# EAGLE board Signalgenerator-xmega (EAGLE 7.1.0)
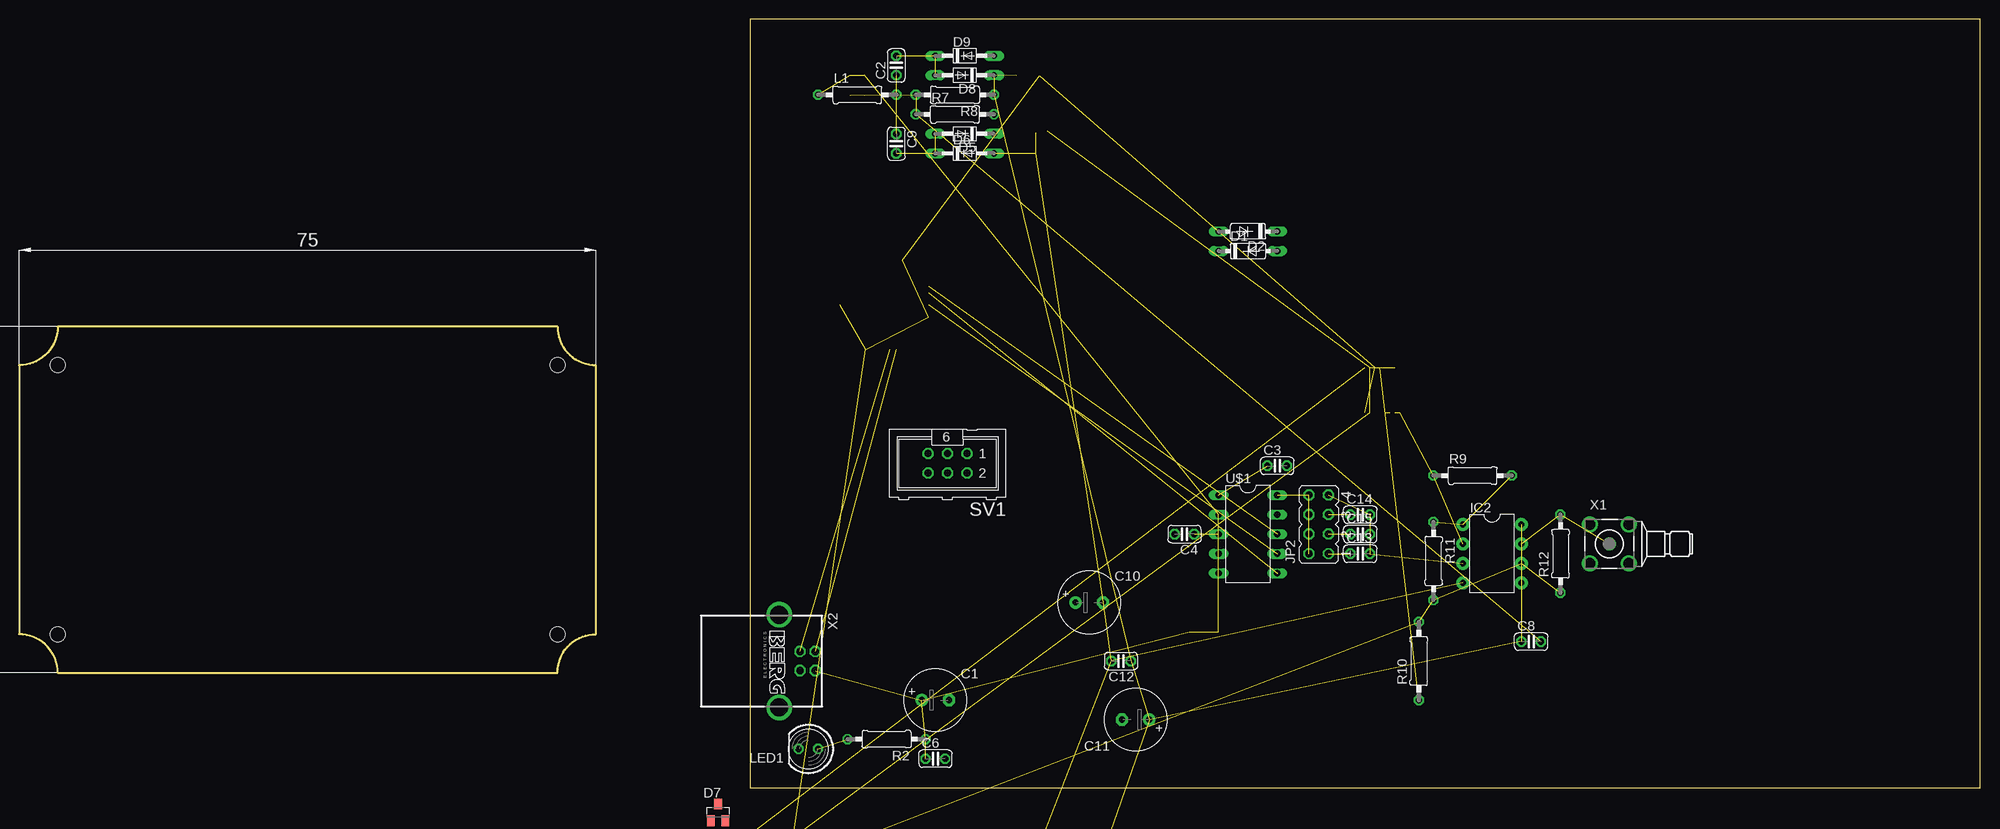
[diagram p0: board, top side]
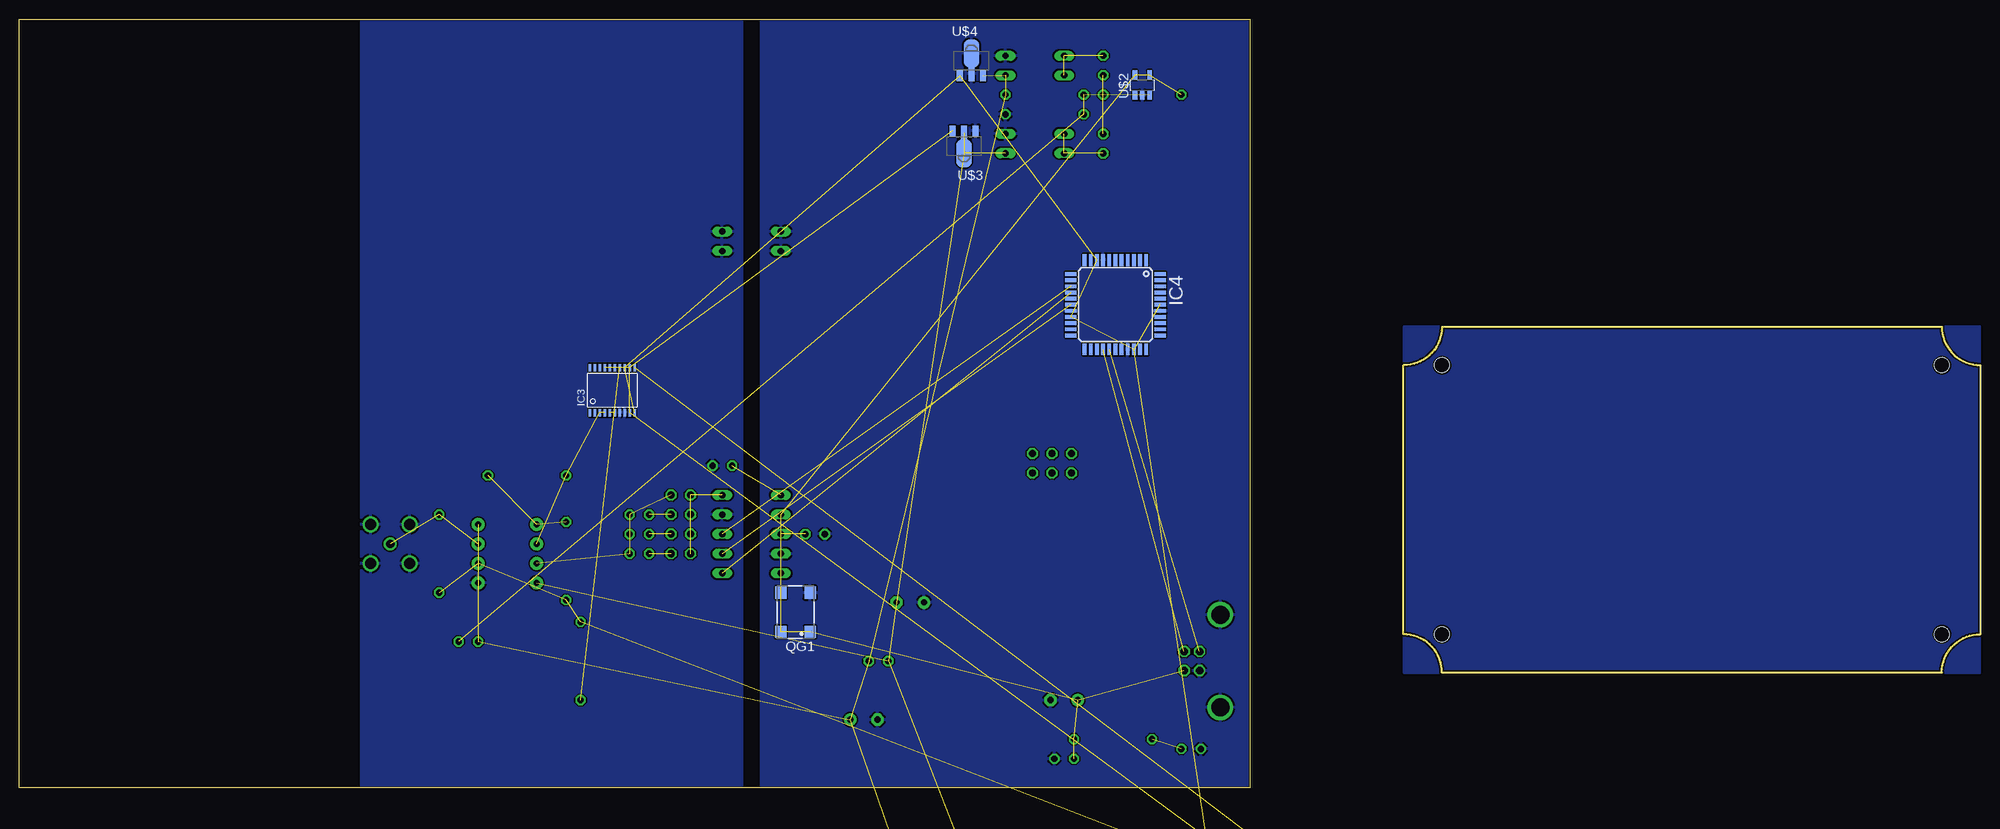
[diagram p1: board, bottom side, seen from below]

Size 255 x 100 mm. Coordinates in mm from the lower left corner, seen from the top.
Outline: 95,0 255,0 255,100 95,100 95,0
Outline: 70,60 5,60 arc-90 0,55 0,20 arc-90 5,15 70,15 arc-90 75,20 75,55 arc-90 70,60
Copper layers (1*16): Top 0.035mm / dielectric 1.5mm / Bottom 0.035mm
Design rules "default *": minimum track width 10mil, minimum drill 24mil, track to track 8mil, track to pad 8mil, pad to pad 8mil, via to via 8mil, smd to smd 8mil, copper to edge 6mil, drill to drill 8mil, minimum pad ring 10mil, minimum via ring 8mil, stop-mask expansion 4mil, vias tented up to drill 0mil, thermal gap 10mil
Holes 2 mm at 5,55 5,20 70,20 70,55

## Footprints (pad centres in the part's own frame; a part is rotated, then mirrored left to right if it is on the bottom)
E3,5-8 = drill 0.813 pad 1.6: + -1.778,0 | drill 0.813 pad 1.6 octagon: - 1.778,0
C025-024X044 = drill 0.813 octagon: 1 -1.27,0; 2 1.27,0
E2,5-7 = drill 0.813 pad 1.6: + -1.27,0 | drill 0.813 pad 1.6 octagon: - 1.27,0
DO35-7 = drill 0.813 long: A 3.81,0; C -3.81,0
DO34-7 = drill 0.813 long: A 3.81,0; C -3.81,0
SOT23 = smd 1 x 1.4: 1 -0.95,-1.1; 2 0.95,-1.1; 3 0,1.1
DIL08 = drill 0.813 pad 1.676: 1 -3.81,-3.81; 2 -1.27,-3.81; 3 1.27,-3.81; 4 3.81,-3.81; 5 3.81,3.81; 6 1.27,3.81; 7 -1.27,3.81; 8 -3.81,3.81
TSSOP20 = smd 0.305 x 0.991: 1 -3.575,-2.918; 2 -2.925,-2.918; 3 -2.275,-2.918; 4 -1.625,-2.918; 5 -0.975,-2.918; 6 -0.325,-2.918; 7 0.325,-2.918; 8 0.975,-2.918; 9 1.625,-2.918; 10 2.275,-2.918; 11 2.275,2.918; 12 1.625,2.918; 13 0.975,2.918; 14 0.325,2.918; 15 -0.325,2.918; 16 -0.975,2.918; 17 -1.625,2.918; 18 -2.275,2.918; 19 -2.925,2.918; 20 -3.575,2.918
TQFP44 = smd 1.5 x 0.5: 1 -5.8,4; 2 -5.8,3.2; 3 -5.8,2.4; 4 -5.8,1.6; 5 -5.8,0.8; 6 -5.8,0; 7 -5.8,-0.8; 8 -5.8,-1.6; 9 -5.8,-2.4; 10 -5.8,-3.2; 11 -5.8,-4; 23 5.8,-4; 24 5.8,-3.2; 25 5.8,-2.4; 26 5.8,-1.6; 27 5.8,-0.8; 28 5.8,0; 29 5.8,0.8; 30 5.8,1.6; 31 5.8,2.4; 32 5.8,3.2; 33 5.8,4 | smd 0.5 x 1.5: 12 -4,-5.8; 13 -3.2,-5.8; 14 -2.4,-5.8; 15 -1.6,-5.8; 16 -0.8,-5.8; 17 0,-5.8; 18 0.8,-5.8; 19 1.6,-5.8; 20 2.4,-5.8; 21 3.2,-5.8; 22 4,-5.8; 34 4,5.8; 35 3.2,5.8; 36 2.4,5.8; 37 1.6,5.8; 38 0.8,5.8; 39 0,5.8; 40 -0.8,5.8; 41 -1.6,5.8; 42 -2.4,5.8; 43 -3.2,5.8; 44 -4,5.8
JP4Q = drill 0.914 octagon: 1 -3.81,-1.27; 2 -3.81,1.27; 3 -1.27,-1.27; 4 -1.27,1.27; 5 1.27,-1.27; 6 1.27,1.27; 7 3.81,-1.27; 8 3.81,1.27
0207/10 = drill 0.813 octagon: 1 -5.08,0; 2 5.08,0
LED5MM = drill 0.813 octagon: A -1.27,0; K 1.27,0
SM77H = smd 1.6 x 1.5: 1 -2.55,-1.9; 2 2.55,-1.9; 3 2.55,1.9; 4 -2.55,1.9
ML6 = drill 0.914 octagon: 1 -2.54,-1.27; 2 -2.54,1.27; 3 0,-1.27; 4 0,1.27; 5 2.54,-1.27; 6 2.54,1.27
DIL10 = drill 0.813 long: 1 -5.08,-3.81; 2 -2.54,-3.81; 3 0,-3.81; 4 2.54,-3.81; 5 5.08,-3.81; 6 5.08,3.81; 7 2.54,3.81; 8 0,3.81; 9 -2.54,3.81; 10 -5.08,3.81
SOT23-5 = smd 0.6 x 1.2: 1 -0.95,-1.306; 2 0,-1.306; 3 0.95,-1.306; 4 0.95,1.306; 5 -0.95,1.306
SOT89 = smd 0.8 x 1.4: 1 -1.499,-1.981; 3 1.499,-1.981 | smd 0.8 x 1.9: 2 0,-1.727 | smd 2.032 x 3.65: 2@1 0,0.94
BU-SMB-H = drill 1.1: 1 0,0 | drill 1.4: 2 -2.54,2.54; 3 2.54,2.54; 4 2.54,-2.54; 5 -2.54,-2.54
PN61729-S = drill 0.95 octagon: 1 1.25,4.71; 2 -1.25,4.71; 3 -1.25,2.71; 4 1.25,2.71 | drill 2.3 pad 2.9: S1 -6.02,0; S2 6.02,0

## Placement (x,y rotation side)
C1  [E3,5-8]  119.13,11.43 0 top
C2  [C025-024X044]  114.05,93.98 90 top
C3  [C025-024X044]  163.58,41.91 0 top
C4  [C025-024X044]  151.51,33.02 180 top
C5  [E2,5-7]  92.14,-37.47 0 top  (outside the outline)
C6  [C025-024X044]  119.13,3.81 0 top
C7  [E2,5-7]  92.14,-44.77 0 top  (outside the outline)
C8  [C025-024X044]  196.6,19.05 0 top
C9  [C025-024X044]  114.05,83.82 270 top
C10  [E3,5-8]  139.13,24.13 0 top
C11  [E3,5-8]  145.16,8.89 180 top
C12  [C025-024X044]  143.26,16.51 180 top
C13  10nF  [C025-024X044]  174.38,30.48 0 top
C14  220µF  [C025-024X044]  174.38,35.56 0 top
C15  1µF  [C025-024X044]  174.38,33.02 0 top
C16  [E2,5-7]  92.14,-52.07 0 top  (outside the outline)
C17  [E2,5-7]  92.14,-59.37 0 top  (outside the outline)
C18  [E2,5-7]  92.14,-66.67 0 top  (outside the outline)
C19  [E2,5-7]  102.62,-66.67 0 top  (outside the outline)
C20  [E2,5-7]  92.14,-73.98 0 top  (outside the outline)
C21  [E2,5-7]  102.62,-73.98 0 top  (outside the outline)
C22  [E2,5-7]  92.14,-103.82 0 top  (outside the outline)
C23  [E2,5-7]  102.62,-103.82 0 top  (outside the outline)
C24  [E2,5-7]  92.14,-111.12 0 top  (outside the outline)
C25  [E2,5-7]  102.62,-111.12 0 top  (outside the outline)
C26  [E2,5-7]  92.14,-140.97 0 top  (outside the outline)
C27  [E2,5-7]  102.62,-140.97 0 top  (outside the outline)
C28  [E2,5-7]  92.14,-148.27 0 top  (outside the outline)
C29  [E2,5-7]  102.62,-148.27 0 top  (outside the outline)
D1  1N4148DO35-7  [DO35-7]  159.77,69.85 0 top
D2  1N4148DO35-7  [DO35-7]  159.77,72.39 180 top
D5  BAT81  [DO34-7]  122.94,85.09 180 top
D6  BAT81  [DO34-7]  122.94,82.55 0 top
D7  BAT54S  [SOT23]  90.87,-3.17 0 top
D8  BAT81  [DO34-7]  122.94,92.71 180 top
D9  BAT81  [DO34-7]  122.94,95.25 0 top
IC2  NE5532N  [DIL08]  191.52,30.48 270 top
IC3  AD5144A  [TSSOP20]  177.23,51.75 0 bottom
IC4  XMEGA16C4AUR  [TQFP44]  112.46,62.87 270 bottom
JP2  [JP4Q]  168.98,34.29 90 top
L1  [0207/10]  108.97,90.17 0 top
L2  [0207/10]  94.68,-14.61 0 top  (outside the outline)
L3  [0207/10]  94.68,-19.05 0 top  (outside the outline)
L4  [0207/10]  94.68,-23.5 0 top  (outside the outline)
L5  [0207/10]  94.68,-27.94 0 top  (outside the outline)
L6  [0207/10]  94.68,-32.38 0 top  (outside the outline)
L7  [0207/10]  94.68,-80.96 0 top  (outside the outline)
L8  [0207/10]  94.68,-85.41 0 top  (outside the outline)
L9  [0207/10]  94.68,-89.85 0 top  (outside the outline)
L10  [0207/10]  94.68,-94.3 0 top  (outside the outline)
L11  [0207/10]  94.68,-98.74 0 top  (outside the outline)
L12  [0207/10]  94.68,-118.11 0 top  (outside the outline)
L13  [0207/10]  94.68,-122.56 0 top  (outside the outline)
L14  [0207/10]  94.68,-127 0 top  (outside the outline)
L15  [0207/10]  94.68,-131.44 0 top  (outside the outline)
L16  [0207/10]  94.68,-135.89 0 top  (outside the outline)
L17  [0207/10]  94.68,-155.26 0 top  (outside the outline)
L18  [0207/10]  94.68,-159.7 0 top  (outside the outline)
L19  [0207/10]  94.68,-164.15 0 top  (outside the outline)
L20  [0207/10]  94.68,-168.59 0 top  (outside the outline)
L21  [0207/10]  94.68,-173.04 0 top  (outside the outline)
LED1  [LED5MM]  102.62,5.08 180 top
QG1  SM77H  [SM77H]  154.06,22.86 90 bottom
R2  [0207/10]  112.78,6.35 180 top
R6  10k  [0207/10]  94.68,-10.16 0 top  (outside the outline)
R7  [0207/10]  121.67,87.63 0 top
R8  [0207/10]  121.67,90.17 180 top
R9  100k  [0207/10]  188.98,40.64 0 top
R10  10k  [0207/10]  182,16.51 90 top
R11  10k  [0207/10]  183.9,29.53 270 top
R12  10k  [0207/10]  200.41,30.48 90 top
SV1  [ML6]  120.72,42.23 180 top
U$1  AD9833-P  [DIL10]  159.77,33.02 270 top
U$2  LT1615  [SOT23-5]  108.97,91.44 0 bottom
U$3  NJM79L03UA  [SOT89]  132.15,83.5 180 bottom
U$4  NJM78L03UA  [SOT89]  131.19,94.61 0 bottom
X1  BU-SMB-H  [BU-SMB-H]  206.76,31.75 0 top
X2  PN61729-S  [PN61729-S]  98.81,16.51 270 top

## Library data of the parts
C1-C29 L1-L21 R2 R6-R12 = rcl
D1 D2 D5-D9 = diode
IC2 U$2-U$4 = linear
IC3 U$1 = analog-devices
IC4 = atmel; OC_FARNELL: unknown; OC_NEWARK: unknown
JP2 = jumper
LED1 = led
QG1 = crystal; OC_FARNELL: unknown; OC_NEWARK: unknown
SV1 = con-harting-ml; OC_FARNELL: unknown; OC_NEWARK: unknown
X1 = con-coax; OC_FARNELL: unknown; OC_NEWARK: unknown
X2 = con-berg; OC_FARNELL: unknown; OC_NEWARK: unknown

## Nets
+3V3: IC3.10 IC3.13 IC3.16 IC3.17 IC4.9 IC4.19 IC4.31 IC4.39 L7.1 U$4.1
+12V: C8.1 C11.+ C12.1 D8.C IC2.8 L17.1 R8.1 U$4.3
-3V3: IC3.9 IC3.12 IC3.15 L2.1 U$3.3
-12V: C10.- C12.2 D6.A IC2.4 L12.1 U$3.2 U$3.2@1
AGND: C3.2 D1.A D2.C IC2.5 IC3.7 IC3.8 U$1.9 X1.2 X1.3 X1.4 X1.5
DGND: C1.- C4.2 C6.2 C10.+ C11.- D1.C D2.A D5.C D9.A IC4.8 IC4.18 IC4.30 IC4.38 LED1.K QG1.2 R7.2 U$1.4 U$2.2 U$3.1 U$4.2 U$4.2@1 X2.4 X2.S1 X2.S2
N$1: IC4.17 U$1.7
N$2: IC4.26 X2.2
N$3: C3.1 U$1.1
N$4: IC4.15 U$1.6
N$5: IC4.27 X2.3
N$6: IC4.14 U$1.8
N$7: C5.- C7.- C16.- C17.-
N$8: C5.+ L2.2 L3.1
N$9: C4.1 U$1.3
N$10: C7.+ L3.2 L4.1
N$11: QG1.3 U$1.5
N$12: C16.+ L4.2 L5.1
N$13: C17.+ L5.2 L6.1
N$15: L6.2
N$16: IC4.22
N$17: LED1.A R2.2
N$18: C18.+ L7.2 L8.1
N$19: C19.+ L8.2 L9.1
N$20: C8.2 R7.1 R8.2 U$2.3
N$21: JP2.2 JP2.4 JP2.6 JP2.8 U$1.10
N$22: C9.2 D5.A D6.C
N$23: C2.1 C9.1 L1.2 U$2.1
N$24: C14.1 JP2.5
N$25: C2.2 D8.A D9.C
N$26: C13.1 JP2.1
N$27: IC2.2 IC3.3 IC3.4 R9.1
N$28: C13.2 C14.2 C15.2 IC2.3 JP2.7
N$29: IC2.1 R9.2 R11.1
N$30: IC2.6 R6.2 R10.2 R11.2 R12.1
N$31: IC2.7 R12.2 X1.1
N$32: C15.1 JP2.3
N$33: IC3.5 IC3.6
N$34: IC3.14 R10.1
N$35: IC3.11 R6.1
N$36: C20.+ L9.2 L10.1
N$37: C21.+ L10.2 L11.1
N$38: C18.- C19.- C20.- C21.-
N$39: L11.2
N$40: IC4.23
N$41: C22.+ L12.2 L13.1
N$42: C23.+ L13.2 L14.1
N$43: C24.+ L14.2 L15.1
N$44: C25.+ L15.2 L16.1
N$45: C22.- C23.- C24.- C25.-
N$46: L16.2
N$48: C26.+ L17.2 L18.1
N$49: C27.+ L18.2 L19.1
N$50: C28.+ L19.2 L20.1
N$51: C29.+ L20.2 L21.1
N$52: C26.- C27.- C28.- C29.-
N$53: L21.2
VCC: C1.+ C6.1 L1.1 QG1.1 QG1.4 R2.1 U$1.2 U$2.4 U$2.5 X2.1

## Tracks (layer width: path | path; a pad name or v marks a point on that pad's centre or on a via)
+3V3  (9 unrouted)
+12V  (7 unrouted)
-3V3  (4 unrouted)
-12V  (6 unrouted)
AGND
  pour Bottom: 161.04,0 161.04,100.33 210.57,100.33 210.57,0
DGND
  pour Bottom: 95,0 158.5,0 158.5,100.33 95,100.33
N$1  (1 unrouted)
N$2  (1 unrouted)
N$3  (1 unrouted)
N$4  (1 unrouted)
N$5  (1 unrouted)
N$6  (1 unrouted)
N$7  (3 unrouted)
N$8  (2 unrouted)
N$9  (1 unrouted)
N$10  (2 unrouted)
N$11  (1 unrouted)
N$12  (2 unrouted)
N$13  (2 unrouted)
N$14
  pour Bottom (isolate 0.203): 0,60 75,60 75,15 0,15
N$17  (1 unrouted)
N$18  (2 unrouted)
N$19  (2 unrouted)
N$20  (3 unrouted)
N$21  (4 unrouted)
N$22  (2 unrouted)
N$23  (3 unrouted)
N$24  (1 unrouted)
N$25  (2 unrouted)
N$26  (1 unrouted)
N$27  (3 unrouted)
N$28  (4 unrouted)
N$29  (2 unrouted)
N$30  (4 unrouted)
N$31  (2 unrouted)
N$32  (1 unrouted)
N$33  (1 unrouted)
N$34  (1 unrouted)
N$35  (1 unrouted)
N$36  (2 unrouted)
N$37  (2 unrouted)
N$38  (3 unrouted)
N$41  (2 unrouted)
N$42  (2 unrouted)
N$43  (2 unrouted)
N$44  (2 unrouted)
N$45  (3 unrouted)
N$48  (2 unrouted)
N$49  (2 unrouted)
N$50  (2 unrouted)
N$51  (2 unrouted)
N$52  (3 unrouted)
VCC  (9 unrouted)